# Altium PCB PCB1.PcbDoc
Units mm, origin at the board's own origin, x right, y up, seen from the top; angles counter-clockwise.
Board outline 38.75 x 31.25 mm, 2 copper layers (Top Layer, Bottom Layer); 67 components, 59 nets, 160 pads, 28 vias.
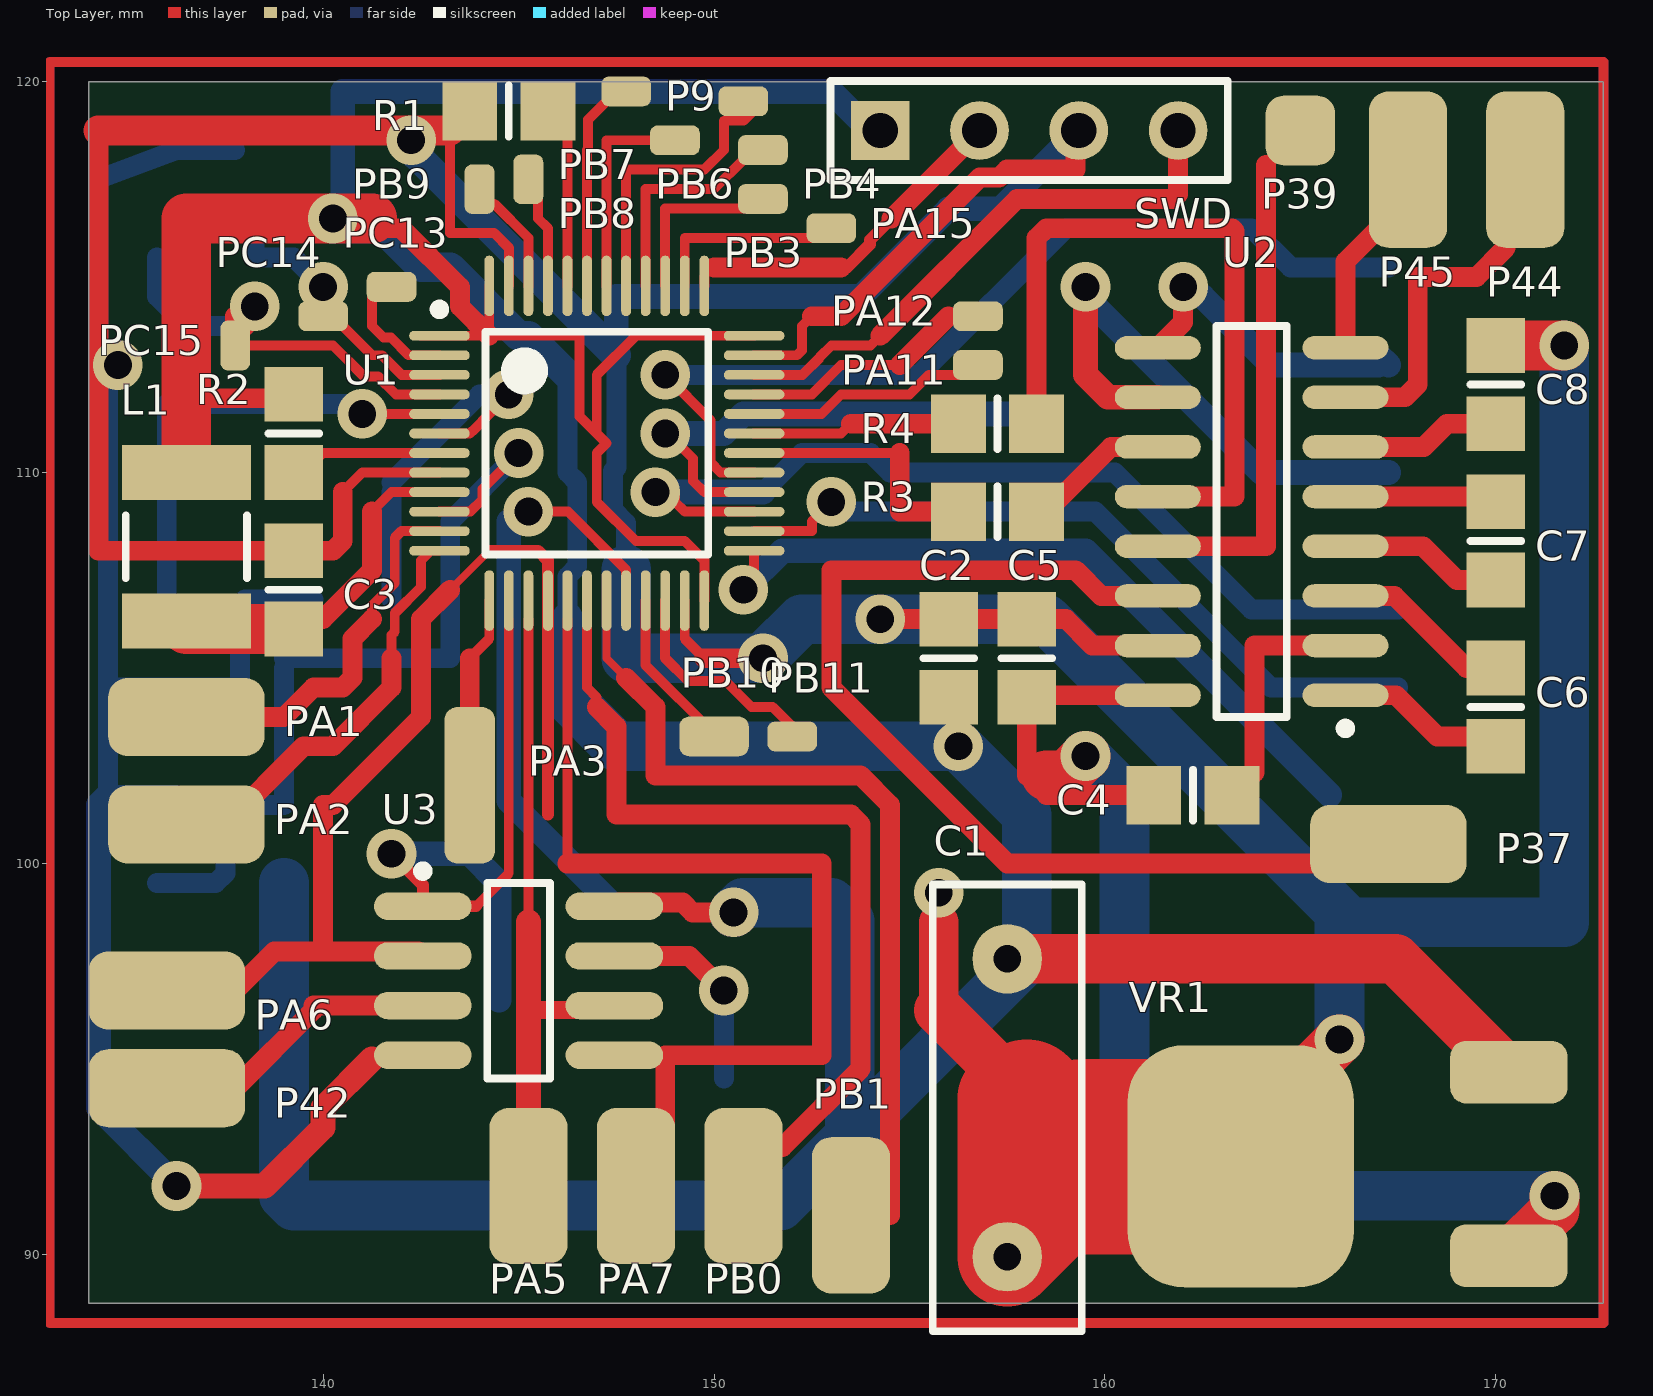
[diagram p0: Top Layer view]
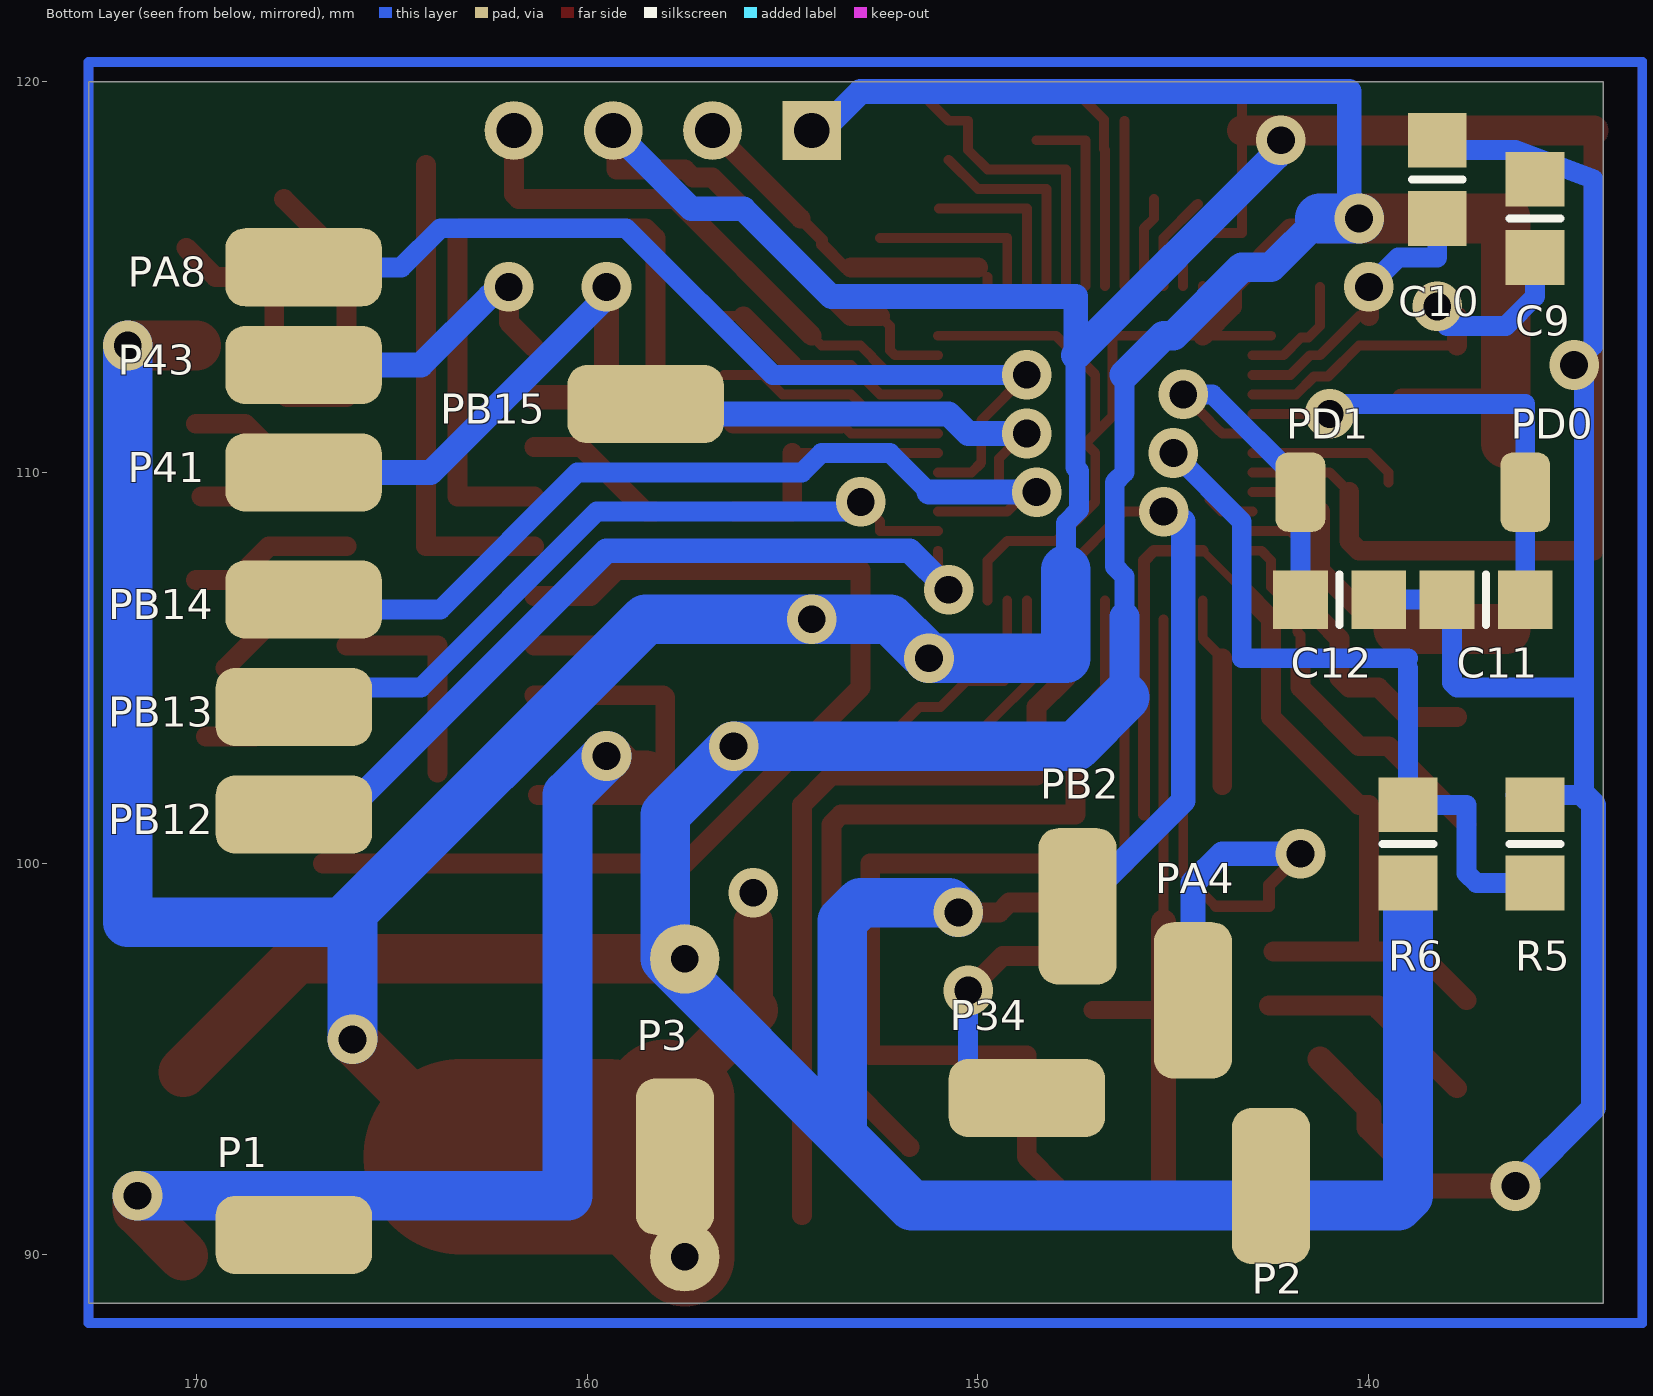
[diagram p1: Bottom Layer view, seen from below]

## Layer stack, top to bottom
Top Layer: signal copper 0.0356
Dielectric: dielectric 0.32, FR-4, Dk 4.8
Bottom Layer: signal copper 0.0356

## Board outline
134,88.75 172.75,88.75 172.75,120 134,120

## Design rules (kind name [scope] priority, off if disabled: settings)
AssemblyTestPointUsage [All] p1 off:
AssemblyTestpoint [All] p1 off: testpointundercomponent=TRUE minsize=1.016 maxsize=2.54 preferedsize=1.524 minholesize=0 maxholesize=1.016 preferedholesize=0.813 testpointgrid=0.025 usegrid=TRUE gridtolerance=0 allowsidetop=TRUE allowsidebottom=TRUE
Clearance [All] p1: gap=0.2
Clearance Clearance_1 [All] p2: gap=0.2
Clearance Polygon [All vs IsRegion] p3: gap=2
FabricationTestPointUsage [All] p1 off: valid=0 allowmultiple=FALSE
FabricationTestpoint [All] p1 off: side=3 testpointundercomponent=TRUE minsize=1.016 maxsize=2.54 preferedsize=1.524 minholesize=0 maxholesize=1.016 preferedholesize=0.813 testpointgrid=0.025 allowsidetop=TRUE allowsidebottom=TRUE usegrid=TRUE gridtolerance=0
MinimumSolderMaskSliver [All] p1 off: minsoldermaskwidth=0.254
PasteMaskExpansion [All] p1 off: expansion=0
PolygonConnect [All] p1: connectstyle=Relief reliefconductorwidth=0.254 reliefentries=4 polygonreliefangle="90 Angle" airgapwidth=0.254
RoutingVias [All] p1: holewidth=0.711 width=1.27 viastyle="Through Hole" minholewidth=0.711 minwidth=1.27 maxholewidth=0.711 maxwidth=1.27
SilkToSilkClearance [All] p1 off: silktosilkclearance=0.254
SilkscreenOverComponentPads [All] p1 off: minsilkscreentomaskgap=0.254
SolderMaskExpansion [All] p1 off: expansion=0.102
Width [All] p1 off: maxlimit=0.254 minlimit=0.254 preferedwidth=0.254
20 further rules are at their usual default settings.

## Components (designator, comment, footprint, x,y, rotation, side; value= is the part's Value field where it differs from the comment)
C1 "Cap Pol1" RAD-0.3 157.5,93.75 r270 top
C2 "Cap" 6-0805_M 156,105.25 r270 top
C3 "Cap" 6-0805_M 139.25,107 r270 top
C4 "Cap" 6-0805_M 162.25,101.75 r180 top
C5 "Cap" 6-0805_M 158,105.25 r270 top
C6 "Cap" 6-0805_M 170,104 r270 top
C7 "Cap" 6-0805_M 170,108.25 r270 top
C8 "Cap" 6-0805_M 170,112.25 r270 top
C9 "Cap" 6-0805_M 135.75,116.5 r90 bottom
C10 "Cap" 6-0805_M 138.25,117.5 r270 bottom
C11 "Cap" 6-0805_M 137,106.75 r0 bottom
C12 "Cap" 6-0805_M 140.75,106.75 r0 bottom
L1 "Inductor" INDC4532 136.5,108.1 r90 top
P1 "Header 1" PIN1-SMALL#1 167.5,90.5 r270 bottom
P2 "Header 1" PIN1-SMALL#1 142.5,91.75 r180 bottom
P3 "Header 1" PIN1-SMALL#1 157.75,92.5 r180 bottom
P9 "Header 1" PIN1-SMALL#2 150.75,119.5 r270 top
P34 "Header 1" PIN1-SMALL#1 148.75,94 r90 bottom
P37 "Header 1" PIN1-SMALL#1 167.25,100.5 r90 top
P39 "Header 1" PIN1-SMALL#3 165,118.75 r90 top
P41 "Header 1" PIN1-SMALL#1 167.25,110 r90 bottom
P42 "Header 1" PIN1-SMALL#1 136,94.25 r270 top
P43 "Header 1" PIN1-SMALL#1 167.25,112.75 r270 bottom
P44 "Header 1" PIN1-SMALL#1 170.75,117.75 r0 top
P45 "Header 1" PIN1-SMALL#1 167.75,117.75 r0 top
PA1 "Header 1" PIN1-SMALL#1 136.5,103.75 r90 top
PA2 "Header 1" PIN1-SMALL#1 136.5,101 r90 top
PA3 "Header 1" PIN1-SMALL#4 143.75,102 r0 top
PA4 "Header 1" PIN1-SMALL#1 144.5,96.5 r0 bottom
PA5 "Header 1" PIN1-SMALL#1 145.25,91.75 r0 top
PA6 "Header 1" PIN1-SMALL#1 136,96.75 r270 top
PA7 "Header 1" PIN1-SMALL#1 148,91.75 r0 top
PA8 "Header 1" PIN1-SMALL#1 167.25,115.25 r90 bottom
PA11 "Header 1" PIN1-SMALL#2 156.75,112.75 r90 top
PA12 "Header 1" PIN1-SMALL#2 156.75,114 r90 top
PA15 "Header 1" PIN1-SMALL#2 153,116.25 r90 top
PB0 "Header 1" PIN1-SMALL#1 150.75,91.75 r0 top
PB1 "Header 1" PIN1-SMALL#1 153.5,91 r0 top
PB2 "Header 1" PIN1-SMALL#1 147.45,98.905 r180 bottom
PB3 "Header 1" PIN1-SMALL#2 151.25,117 r90 top
PB4 "Header 1" PIN1-SMALL#2 151.25,118.25 r90 top
PB6 "Header 1" PIN1-SMALL#2 149,118.5 r90 top
PB7 "Header 1" PIN1-SMALL#2 147.75,119.75 r90 top
PB8 "Header 1" PIN1-SMALL#2 145.25,117.5 r0 top
PB9 "Header 1" PIN1-SMALL#2 144,117.25 r0 top
PB10 "Header 1" PIN1-SMALL#5 150,103.25 r0 top
PB11 "Header 1" PIN1-SMALL#2 152,103.25 r90 top
PB12 "Header 1" PIN1-SMALL#1 167.5,101.25 r270 bottom
PB13 "Header 1" PIN1-SMALL#1 167.5,104 r90 bottom
PB14 "Header 1" PIN1-SMALL#1 167.25,106.75 r90 bottom
PB15 "Header 1" PIN1-SMALL#1 158.5,111.75 r270 bottom
PC13 "Header 1" PIN1-SMALL#2 141.75,114.75 r90 top
PC14 "Header 1" PIN1-SMALL#2 140,114 r270 top
PC15 "Header 1" PIN1-SMALL#2 137.75,113.25 r180 top
PD0 "Header 1" PIN1-SMALL#6 136,109.5 r180 bottom
PD1 "Header 1" PIN1-SMALL#6 141.75,109.5 r180 bottom
R1 "Resistor" 6-0805_M 144.75,119.25 r0 top
R2 "Resistor" 6-0805_M 139.25,111 r270 top
R3 "Resistor" 6-0805_M 157.25,109 r0 top
R4 "Resistor" 6-0805_M 157.25,111.25 r0 top
R5 "Resistor" 6-0805_M 135.75,100.5 r90 bottom
R6 "Resistor" 6-0805_M 139,100.5 r270 bottom
SWD "Header 4" HDR1X4 154.25,118.75 r0 top
U1 "STM32F100C8T6B" TQFP48_L 147,110.75 r0 top
U2 "MAX232CSE" NSO16_N 163.75,108.75 r180 top
U3 "GD25Q32" SO8_M 145,97 r0 top
VR1 "Volt Reg" DPAK 165.25,92.25 r180 top

## Footprints (in the part's own frame and the unit in brackets; to place one, negate y for a bottom-side part, rotate by r counter-clockwise, add the part's x,y. Pads: shape width x height; smd on the part's side, far side on the other; paste and mask are expansions set on the pad)
6-0805_M [mm] "Chip Resistor, Body 2.0x1.2mm, IPC Low Density"
  rect 1.4x1.5 smd: 1(-1,0) 2(1,0)
  silkscreen extent 0,-0.65 0,0.65, body extent -1.07,-0.7 1.07,0.7, height 0.7
DPAK [mm]
  rrect50% 3x1.6 smd: 1(-5.08,2.286) 3(-5.08,-2.413)
  rrect50% 5.8x6.2 smd: 2(1.778,0)
HDR1X4 [mm] "Connector; Header; 4 Position"
  rect 1.5x1.5 hole 0.9: 1(0,0)
  round 1.5 hole 0.9: 2(2.54,0) 3(5.08,0) 4(7.62,0)
  silkscreen extent -1.27,-1.27 8.89,1.27
INDC4532 [mm] "Chip Inductor, Body 4.5x3.2mm, IPC High Density"
  rect 1.4x3.3 smd: 1(-1.9,0) 2(1.9,0)
  silkscreen extent -0.8,-1.55 0.8,1.55, body extent -2.4,-1.7 2.4,1.7, height 0.55
NSO16_N [mm] "16-Pin Small Outline Integrated Circuit 1.27 mm Pitch, IPC Medium Density"
  oval 2.2x0.6 smd: 1(-2.4,4.445) 2(-2.4,3.175) 3(-2.4,1.905) 4(-2.4,0.635) 5(-2.4,-0.635) 6(-2.4,-1.905) 7(-2.4,-3.175) 8(-2.4,-4.445) 9(2.4,-4.445) 10(2.4,-3.175) 11(2.4,-1.905) 12(2.4,-0.635) 13(2.4,0.635) 14(2.4,1.905) 15(2.4,3.175) 16(2.4,4.445)
  silkscreen extent -2.53,-5 0.9,5.42, body extent -1.95,-4.95 1.95,4.95, height 1.75
PIN1-SMALL#1 [mm] "Connector; Plug"
  rrect50% 2x4 smd: 1(0,0)
PIN1-SMALL#2 [mm] "Connector; Plug"
  rrect50% 0.762x1.27 smd: 1(0,0)
PIN1-SMALL#3 [mm] "Connector; Plug"
  rrect50% 1.778x1.778 smd: 1(0,0)
PIN1-SMALL#4 [mm] "Connector; Plug"
  rrect50% 1.289x4 smd: 1(0,0)
PIN1-SMALL#5 [mm] "Connector; Plug"
  rrect50% 1.778x1.016 smd: 1(0,0)
PIN1-SMALL#6 [mm] "Connector; Plug"
  rrect50% 1.27x2.032 smd: 1(0,0)
RAD-0.3 [mil] "Radial Cap, Thru-Hole; 2 Leads; 0.3 in Pin Spacing"
  round 70 hole 27.56: 1(-150,0) 2(150,0)
  silkscreen extent -225,-75 225,75
SO8_M [mm] "SOIC, 8-Leads, Body 4.9x3.9mm, Pitch 1.27mm, IPC Low Density"
  oval 2.5x0.7 smd: 1(-2.45,1.905) 2(-2.45,0.635) 3(-2.45,-0.635) 4(-2.45,-1.905) 5(2.45,-1.905) 6(2.45,-0.635) 7(2.45,0.635) 8(2.45,1.905)
  silkscreen extent -2.57,-2.5 0.8,2.93, body extent -2,-2.5 2,2.5, height 1.75
TQFP48_L [mm] "48-Pin Thin Quad Flat Pack 0.5 mm Pitch, IPC High Density"
  oval 1.55x0.25 smd: 1(-4.025,2.75) 2(-4.025,2.25) 3(-4.025,1.75) 4(-4.025,1.25) 5(-4.025,0.75) 6(-4.025,0.25) 7(-4.025,-0.25) 8(-4.025,-0.75) 9(-4.025,-1.25) 10(-4.025,-1.75) 11(-4.025,-2.25) 12(-4.025,-2.75) 25(4.025,-2.75) 26(4.025,-2.25) 27(4.025,-1.75) 28(4.025,-1.25) 29(4.025,-0.75) 30(4.025,-0.25) 31(4.025,0.25) 32(4.025,0.75) 33(4.025,1.25) 34(4.025,1.75) 35(4.025,2.25) 36(4.025,2.75)
  oval 0.25x1.55 smd: 13(-2.75,-4.025) 14(-2.25,-4.025) 15(-1.75,-4.025) 16(-1.25,-4.025) 17(-0.75,-4.025) 18(-0.25,-4.025) 19(0.25,-4.025) 20(0.75,-4.025) 21(1.25,-4.025) 22(1.75,-4.025) 23(2.25,-4.025) 24(2.75,-4.025) 37(2.75,4.025) 38(2.25,4.025) 39(1.75,4.025) 40(1.25,4.025) 41(0.75,4.025) 42(0.25,4.025) 43(-0.25,4.025) 44(-0.75,4.025) 45(-1.25,4.025) 46(-1.75,4.025) 47(-2.25,4.025) 48(-2.75,4.025)
  silkscreen extent -4.15,-2.85 2.85,3.55, body extent -3.5,-3.5 3.5,3.5, height 1.6

## Part data
C1: "Polarized Capacitor (Radial)"
C2 C3 C4 C5 C6 C7 C8 C9 C10 C11 C12: "Capacitor"
P1 P2 P3 P9 P34 P37 P39 P41 P42 P43 P44 P45 PA1 PA2 PA3 PA4 PA5 PA6 PA7 PA8 PA11 PA12 PA15 PB0 PB1 PB2 PB3 PB4 PB6 PB7 PB8 PB9 PB10 PB11 PB12 PB13 PB14 PB15 PC13 PC14 PC15 PD0 PD1: "Header, 1Pin"
SWD: "Header, 4-Pin"
U1: "STM32 ARM-based 32-bit MCU with 32 Kbytes Flash, 48-pin LQFP, Industrial Temperature"
U2 U3: "STM32 ARM-based 32-bit MCU with 16 Kbytes Flash, 20-pin"
VR1: "Voltage Regulator"

## Via types
v1: diameter 1.27, hole 0.711, Top Layer to Bottom Layer, 28 vias

## Nets (pads, with @x,y where several pads share a name; then routed paths per layer and width w, separated by ;. In a path a pad name is that pad's centre, name@x,y a point inside that pad or via, vN(x,y) a via of type N, cw(c..) or ccw(c..) an arc to the next point about the centre after c; other vN are vias at no path point)
+5V: C4.2 C5.2 P1.1 U2.16 VR1.1 | length 34
  Top Layer w0.508: 158,102.25 C5.2 158.055,104.305 U2.16 ; 158.5,101.75 C4.2
  Top Layer w1.27: 158.5,102.25 159,102.25 v1(159.5,102.75) ; VR1.1 171.5,91.134 v1(171.5,91.5)
  Bottom Layer w1.27: v1(159.5,102.75) 160.5,101.75 160.5,91.5 v1(171.5,91.5)
GND: C1.2 C2.1 C3.1 C5.1 C8.1 C9.2 C10.1 C11.2 C12.1 P3.1 R1.1 R5.2 SWD.3 U1.8 U1.23 U1.35 U1.47 U2.15 U3.4 VR1.2 | length 206.6
  Top Layer w0.254: 140.5,109.5 141,110 U1.8 ; R1.1@143.25,119.75 143.25,116.125 144.375,116.125 144.75,115.75 U1.47 ; U1.23 149.25,105.75 149.75,105.25 ; U1.35 152.123,113 152.25,113.127 152.25,113.75 152.5,114
  Top Layer w0.508: 134.25,118.75 134.25,108 C3.1 140.25,108 140.5,108.25 140.5,109.5 ; 149.75,105.25 v1@150.75,105.25 ; 152.5,114 153.25,114 156.796,117.546 157.289,117.546 157.493,117.75 159.25,117.75 SWD.3@159.25,118.67 ; v1(154.25,106.25) C2.1 C5.1 159,106.25 159.675,105.575 U2.15 ; VR1.2 VR1.2@163.472,92.972
  Top Layer w0.635: v1(136.25,91.75) 138.5,91.75 140,93.25 140,93.75 141.25,95
  Top Layer w0.762: 134.25,118.75 R1.1@143.25,118.75
  Top Layer w1: 157.5,94 158,94 ; VR1.2@163.222,92.5 VR1.2
  Top Layer w1.016: 155.75,96.25 155.75,98.5
  Top Layer w1.27: 155.75,96.25 158,94 ; VR1.2@163.472,92.972 v1(166,95.5) ; C8.1 v1(171.75,113.25)
  Top Layer w2.54: 157.5,94 C1.2 VR1.2@160.655,93.095
  Top Layer w3: 158,94 159.5,92.5
  Top Layer w5: 159.5,92.5 VR1.2@163.222,92.5
  Bottom Layer w0.254: v1@134.5,112.5 v1(134.75,112.75)
  Bottom Layer w0.508: 134.5,104.5 137.75,104.5 137.875,104.625 137.875,106.625 C11.2 C12.1 ; v1@134.5,112.5 134.5,101.75 R5.2@136.25,101.75 ; v1(134.75,112.75) 134.25,113.25 134.25,117.5 136.25,118.25 C10.1@137.75,118.25 ; 147.5,113 147.5,110.129 147.411,110.04 147.411,109.049 147.75,108.71 147.75,107.514
  Bottom Layer w0.635: 134.5,101.75 134.25,101.5 134.25,93.75 v1(136.25,91.75) ; 147.5,113 147.5,114.5 153.75,114.5 156,116.75 157.33,116.75 SWD.3
  Bottom Layer w0.762: v1@142.375,118.125 147.5,113
  Bottom Layer w1.27: 147.75,107.514 147.75,105.25 v1(151.25,105.25) ; v1@151.375,105.375 152.25,106.25 v1(154.25,106.25) 158.5,106.25 166.25,98.5 171.75,98.5 v1(171.75,113.25) ; v1(166,95.5) 166,98.75
  other v1: 155.75,99.25 142.25,118.5
MISO: PA6.1 U1.16 U3.2 | length 25.7
  Top Layer w0.203: 143.25,107 144.25,108
  Top Layer w0.305: 144.25,108 145.5,108 145.75,107.75 145.75,101.25
  Top Layer w0.508: PA6.1@137.5,96.5 138.75,97.75 140,97.75 ; U3.2@142.435,97.75 140,97.75 ; 143.25,107 142.5,106.25 142.5,103.75 140.25,101.5 140,101.5 140,97.75
MOSI: PA7.1 U1.17 U3.5 | length 25.3
  Top Layer w0.25: 146.25,100 U1.17@146.25,106.25
  Top Layer w0.5: 146.25,100 152.75,100 152.75,95.095 148.75,95.095
  Top Layer w0.508: PA7.1 148.75,92.5 148.75,95.095
NetC3_2: C3.2 L1.1 U1.9 | length 7.9
  Top Layer w0.254: 141.25,109 141.75,109.5 U1.9
  Top Layer w0.508: 140,106.25 141.25,107.5 141.25,109
  Top Layer w1.27: L1.1@136.5,106 C3.2
NetC4_1: C4.1 U2.2 | length 5.6
  Top Layer w0.508: C4.1@163.825,102.325 163.825,105.575 U2.2
NetC6_1: C6.1 U2.3 | length 3.9
  Top Layer w0.508: U2.3 167.405,106.845 C6.1@169.25,105
NetC6_2: C6.2 U2.1 | length 4
  Top Layer w0.508: U2.1 167.445,104.305 168.5,103.25 C6.2@169.75,103.25
NetC7_1: C7.1 U2.5 | length 3.7
  Top Layer w0.508: U2.5 C7.1@169.865,109.385
NetC7_2: C7.2 U2.4 | length 4.2
  Top Layer w0.508: U2.4 168.135,108.115 169,107.25 C7.2
NetC8_2: C8.2 U2.6 | length 4.1
  Top Layer w0.508: U2.6 168.155,110.655 168.75,111.25 C8.2
NetC9_1: C9.1 PC15.1 U1.4 | length 10.2
  Top Layer w0.254: PC15.1@138,113.25 140.25,113.25 141.038,112.462 141.398,112.462 141.86,112 U1.4
  Top Layer w0.508: PC15.1 137.75,114 PC15.1@138,113.75
  Bottom Layer w0.508: C9.1 135.75,114.5 136.5,113.75 v1@138,113.75
  other v1: 138.25,114.25
NetC10_2: C10.2 PC14.1 U1.3 | length 7.2
  Top Layer w0.254: PC14.1@140.25,114 141.25,113 141.503,113 142.003,112.5 U1.3
  Top Layer w0.508: PC14.1 v1(140,114.75)
  Bottom Layer w0.508: C10.2 138.25,115.5 139.25,115.5 v1(140,114.75)
NetC11_1: C11.1 PD0.1 U1.5 | length 12.1
  Top Layer w0.254: v1@141,111.75 141.25,111.5 U1.5
  Bottom Layer w0.508: C11.1 PD0.1 136,111.75 v1@141,111.75
  other v1: 141,111.5
NetC12_2: C12.2 PD1.1 U1.6 | length 8.9
  Top Layer w0.254: U1.6 143.75,111 143.798,111.048 143.812,111.048 144.077,111.313 144.077,111.327 v1(144.75,112)
  Bottom Layer w0.508: C12.2 PD1.1 ; PD1.1@141.75,109.75 144,112 v1(144.75,112)
NetP9_1: P9.1 U1.41 | length 7.6
  Top Layer w0.254: U1.41 147.75,117.75 149.75,117.75 150.25,118.25 150.25,119 150.75,119 P9.1@151.25,119.5
NetP34_1: P34.1 U3.7 | length 5.4
  Top Layer w0.508: U3.7 149.365,97.635 v1(150.25,96.75)
  Bottom Layer w0.508: P34.1@150.25,94.5 v1(150.25,96.75)
NetP37_1: P37.1 U2.14 | length 27.2
  Top Layer w0.508: U2.14 159.905,106.845 159.25,107.5 153,107.5 153,104.5 157.5,100 P37.1@166.75,100
NetP39_1: P39.1 U2.13 | length 12.5
  Top Layer w0.508: U2.13 164.115,108.115 164.115,117.865
NetP41_1: P41.1 U2.10 | length 13.8
  Top Layer w0.635: v1(159.5,114.75) 159.5,112.5 160.075,111.925 U2.10
  Bottom Layer w0.635: v1@159.625,114.375 164,110 P41.1
NetP42_1: P42.1 U3.3 | length 5.7
  Top Layer w0.508: P42.1@137.75,94.25 139.75,96.25 139.75,96.365 U3.3
NetP43_1: P43.1 U2.9 | length 7.4
  Top Layer w0.508: U2.9 162,113.845 v1(162,114.75)
  Bottom Layer w0.635: v1@162.5,114.5 164.25,112.75 P43.1@167,112.75 ; P43.1@167,113 P43.1
NetP44_1: P44.1 U2.7 | length 7.3
  Top Layer w0.508: U2.7 167.675,111.925 168,112.25 168,115 169.5,115 170.25,115.75
NetP45_1: P45.1 U2.8 | length 4.5
  Top Layer w0.508: U2.8 166.15,115.4 P45.1@167.75,117
NetPA1_1: PA1.1 U1.11 | length 8.7
  Top Layer w0.254: 141.25,106.25 141.25,106.597 141.831,107.178 141.831,108.331 142,108.5 U1.11
  Top Layer w0.508: PA1.1@137.75,103.75 139,103.75 139.75,104.5 140.5,104.5 140.75,104.75 140.75,105.75 141.25,106.25
NetPA2_1: PA2.1 U1.12 | length 9.8
  Top Layer w0.254: 141.75,105.25 141.75,105.847 141.831,105.928 141.831,106.403 142.5,107.072 142.5,107.75 142.75,108 U1.12
  Top Layer w0.508: PA2.1@137.5,101 139.5,103 140.25,103 141.75,104.5 141.75,105.25
NetPA3_1: PA3.1 U1.13 | length 4.9
  Top Layer w0.254: 143.75,105.25 144.25,105.75 U1.13
  Top Layer w0.508: PA3.1 143.75,105.25
NetPA8_1: PA8.1 U1.29 | length 24.4
  Top Layer w0.254: v1(148.75,112.5) 149.916,111.334 149.916,110.25 150.166,110 U1.29
  Bottom Layer w0.508: v1(148.75,112.5) 155.25,112.5 159,116.25 163.75,116.25 164.75,115.25 PA8.1
NetPA11_1: PA11.1 U1.32 | length 5.9
  Top Layer w0.254: U1.32 152.75,111.5 153.25,112 155,112 155.5,112.5 PA11.1@156.5,112.5
NetPA12_1: PA12.1 U1.33 | length 6.6
  Top Layer w0.254: U1.33 152.5,112 153.25,112.75 154.75,112.75 ; 156,114 PA12.1
  Top Layer w0.508: 154.75,112.75 156,114
NetPA15_1: PA15.1 U1.38 | length 4.5
  Top Layer w0.254: U1.38 149.25,116 PA15.1@152.5,116
NetPB0_1: PB0.1 U1.18 | length 21.2
  Top Layer w0.254: U1.18 146.75,104.5 147,104.25 147,104
  Top Layer w0.508: 147,104 147.5,103.5 147.5,101.25 153.5,101.25 153.75,101 153.75,94.75 151.75,92.75
NetPB1_1: PB1.1 U1.19 | length 21.8
  Top Layer w0.203: U1.19 147.25,105.25 147.75,104.75
  Top Layer w0.508: 147.75,104.75 148.5,104 148.5,102.25 153.75,102.25 154.5,101.5 154.5,91
NetPB2_1: PB2.1 U1.20 | length 14.6
  Top Layer w0.254: v1@145.5,109 146.264,109 147.75,107.514 U1.20
  Bottom Layer w0.635: v1@144.75,108.75 144.75,101.605 PB2.1
  other v1: 145.25,109
NetPB3_1: PB3.1 U1.39 | length 4.2
  Top Layer w0.254: U1.39 148.75,116.75 PB3.1@151,116.75
NetPB4_1: PB4.1 U1.40 | length 5.3
  Top Layer w0.254: U1.40 148.25,117.25 150,117.25 PB4.1@150.75,118
NetPB6_1: PB6.1 U1.42 | length 5
  Top Layer w0.254: U1.42 147.25,118.5 PB6.1@148.5,118.5
NetPB7_1: PB7.1 U1.43 | length 5.3
  Top Layer w0.254: U1.43 146.75,118.25 146.777,118.277 146.777,119.027 PB7.1@147.5,119.75
NetPB8_1: PB8.1 U1.45 | length 2.3
  Top Layer w0.254: PB8.1@145.5,117 145.5,116.5 145.75,116.25 U1.45
NetPB9_1: PB9.1 U1.46 | length 2.5
  Top Layer w0.254: PB9.1@144.375,116.875 145.25,116 U1.46
NetPB10_1: PB10.1 U1.21 | length 4.1
  Top Layer w0.254: U1.21 148.25,105.072 PB10.1@150,103.322
NetPB11_1: PB11.1 U1.22 | length 5.4
  Top Layer w0.254: U1.22 148.75,105.25 149.331,104.669 150.292,104.669 150.961,104 151.5,104 PB11.1@152,103.5
NetPB12_1: PB12.1 U1.25 | length 19.1
  Top Layer w0.254: v1(150.75,107) 151.025,107.275 U1.25
  Bottom Layer w0.635: v1(150.75,107) 151.75,108 159.5,108 PB12.1@165.75,101.75
NetPB13_1: PB13.1 U1.26 | length 19.2
  Top Layer w0.254: U1.26 152.5,108.5 152.5,108.75 152.75,109 152.75,109.161 v1@152.661,109.25
  Bottom Layer w0.508: v1@152.661,109.25 152.911,109 159.75,109 164.25,104.5 PB13.1@167.5,104.5
  other v1: 153,109.25
NetPB14_1: PB14.1 U1.27 | length 23.9
  Top Layer w0.254: v1(148.5,109.5) 149,109.5 149,109.25 149.25,109 U1.27
  Bottom Layer w0.508: 151.25,109.5 152.25,110.5 154,110.5 154.5,110 160.25,110 163.75,106.5 PB14.1@167.5,106.5
  Bottom Layer w0.635: v1(148.5,109.5) 151.25,109.5
NetPB15_1: PB15.1 U1.28 | length 13
  Top Layer w0.254: v1(148.75,111) v1@148.75,111.072 ; v1@148.75,111.072 149.462,110.36 149.462,109.788 149.75,109.5 U1.28
  Bottom Layer w0.635: v1(148.75,111) 150.25,111 150.75,111.5 PB15.1@158.25,111.5
NetPC13_1: PC13.1 U1.2 | length 3
  Top Layer w0.254: PC13.1@141.25,114.75 141.25,113.75 141.546,113.454 141.732,113.454 142.186,113 U1.2
NetR1_2: R1.2 U1.44 | length 4.2
  Top Layer w0.254: U1.44 146.25,116.25 R1.2@146.25,119
NetR2_2: R2.2 U1.7 | length 3.9
  Top Layer w0.254: R2.2@139.5,109.75 139.5,110 140,110.5 U1.7
NetR3_1: R3.1 U1.30 | length 6.7
  Top Layer w0.254: U1.30 154.75,110.5
  Top Layer w0.508: 154.75,110.5 154.75,109 R3.1
NetR3_2: R3.2 U2.11 | length 3.8
  Top Layer w0.508: R3.2 158.5,109 160.155,110.655 U2.11
NetR4_1: R4.1 U1.31 | length 5.3
  Top Layer w0.254: U1.31 153.25,111 153.5,111.25
  Top Layer w0.508: 153.5,111.25 R4.1
NetR4_2: R4.2 U2.12 | length 18.7
  Top Layer w0.508: R4.2 158.25,116 158.5,116.25 163.25,116.25 163.318,116.182 163.318,109.385 U2.12
NetR5_1: R5.1 R6.1 U1.10 | length 21.6
  Top Layer w0.254: U1.10 143.764,109 144.077,109.313 144.077,109.577 v1(145,110.5)
  Bottom Layer w0.508: R5.1 137.25,99.5 137.5,99.75 137.5,101.5 R6.1 139,105 ; 139,105.25 143.25,105.25 143.25,108.75 v1(145,110.5)
NetSWD_2: SWD.2 U1.37 | length 8.5
  Top Layer w0.254: U1.37 U1.37@149.75,115
  Top Layer w0.305: 153.25,115.25 153.403,115.25 153.987,115.835 153.987,115.947 154.54,116.5
  Top Layer w0.508: 150,115.25 153.25,115.25 ; 154.54,116.5 SWD.2
NetSWD_4: SWD.4 U1.34 | length 14.4
  Top Layer w0.254: U1.34 152.265,112.5 152.704,112.939 152.704,112.954 153,113.25 154,113.25 154.25,113.5
  Top Layer w0.508: 154.25,113.5 157.75,117 161.75,117 161.87,117.12 SWD.4
NSS: PA4.1 U1.14 U3.1 | length 16.8
  Top Layer w0.25: 143.905,98.905 144.75,99.75 U1.14@144.75,106.25
  Top Layer w0.305: v1(141.75,100.25) 142.55,99.45 U3.1 143.905,98.905
  Bottom Layer w0.635: v1(141.75,100.25) 143.75,100.25 144.5,99.5 PA4.1
SCK: PA5.1 U1.15 U3.6 | length 16.1
  Top Layer w0.25: 145.25,98.5 U1.15@145.25,106.25
  Top Layer w0.457: 145.5,96.25 U3.6@147.065,96.25
  Top Layer w0.635: PA5.1 145.25,97 145.25,98.5
VCC: C1.1 C2.2 L1.2 P2.1 R2.1 R6.2 SWD.1 U1.1 U1.24 U1.36 U1.48 U3.8 VR1.3 | length 143.4
  Top Layer w0.254: U1.1@142.5,113.5 144.25,113.5 ; U1.48 144.25,113.5 ; U1.24 149.75,107.75 149.25,108.25 148,108.25 147,109.25 147,110.5 147.25,110.75 ; U1.36 150,113.5 148,113.5 147,112.5 147,111 147.25,110.75 ; 144.25,113.5 146.563,113.5 146.563,111.437 147.25,110.75
  Top Layer w0.508: 136.5,111.9 R2.1@139.15,111.9 ; 141.25,116.5 141.5,116.25 142,116.25 143.5,114.75 143.5,114.25 144.25,113.5 ; U3.8@147.545,99 149.2,99 149.45,98.75 v1(150.5,98.75)
  Top Layer w1.27: 136.5,110.75 136.5,116.5 v1(140.25,116.5) 141.25,116.5 ; C1.1@158,97.56 167.433,97.56 VR1.3
  Bottom Layer w0.508: 146.25,106.313 146.25,107.344 146.5,107.594 146.5,109.75 146.25,110 146.25,112.5
  Bottom Layer w0.635: v1@140.5,116.75 140.5,119.75 153,119.75 154,118.75 SWD.1
  Bottom Layer w0.762: 141.25,116.5 142.5,115.25 143.25,115.25 145,113.5 145.25,113.5 146.25,112.5 ; 146.25,104.25 146.25,106.313
  Bottom Layer w1.27: R6.2 139,91.5 139.25,91.25 151.69,91.25 153.47,93.03 ; v1(140.25,116.5) 141.25,116.5 ; 146.25,104.25 147.5,103 v1(156.25,103) 158,101.25 158,97.56 153.47,93.03 ; v1(150.5,98.75) 150.75,99 153,99 153.47,98.53 153.47,93.03

## Other copper
Multi-Layer:
  lines w0.254: 133,88.25 172.75,88.25 172.75,120.5 133,120.5 133,88.25